# Altium PCB main_v2.PCBDOC
Units mm, origin at the board's own origin, x right, y up, seen from the top; angles counter-clockwise.
Board outline 101.56 x 52.22 mm, 2 copper layers (Top Layer, Bottom Layer); 5 components, 17 nets, 120 pads, 2 vias.
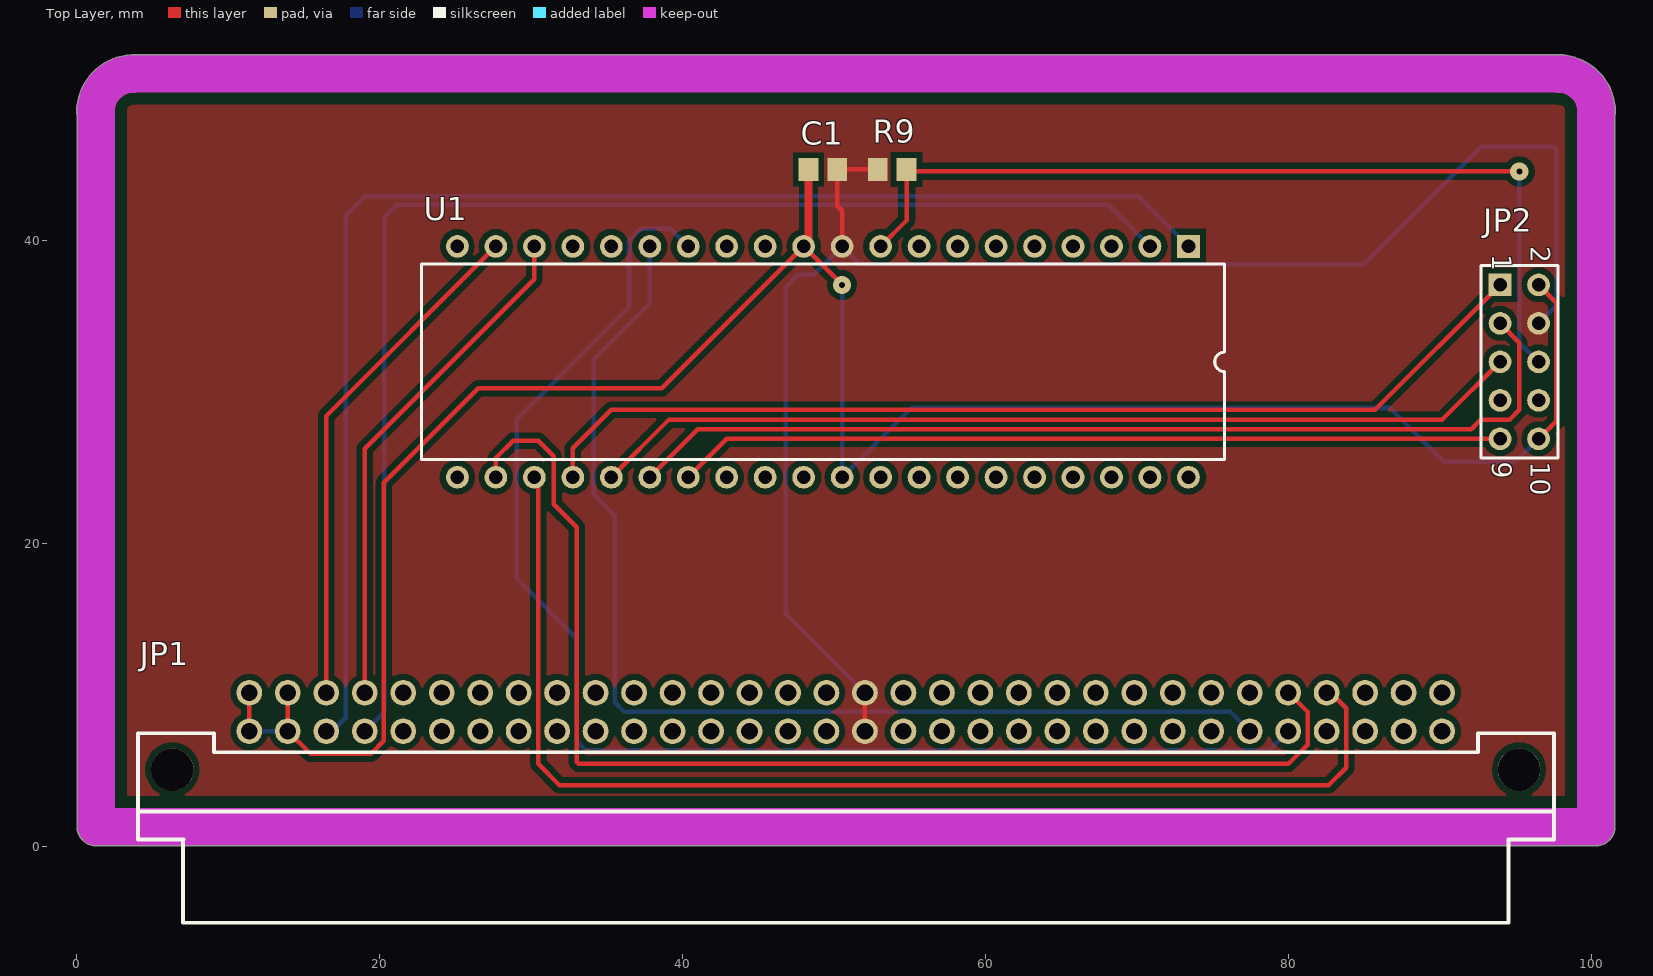
[diagram p0: Top Layer view]
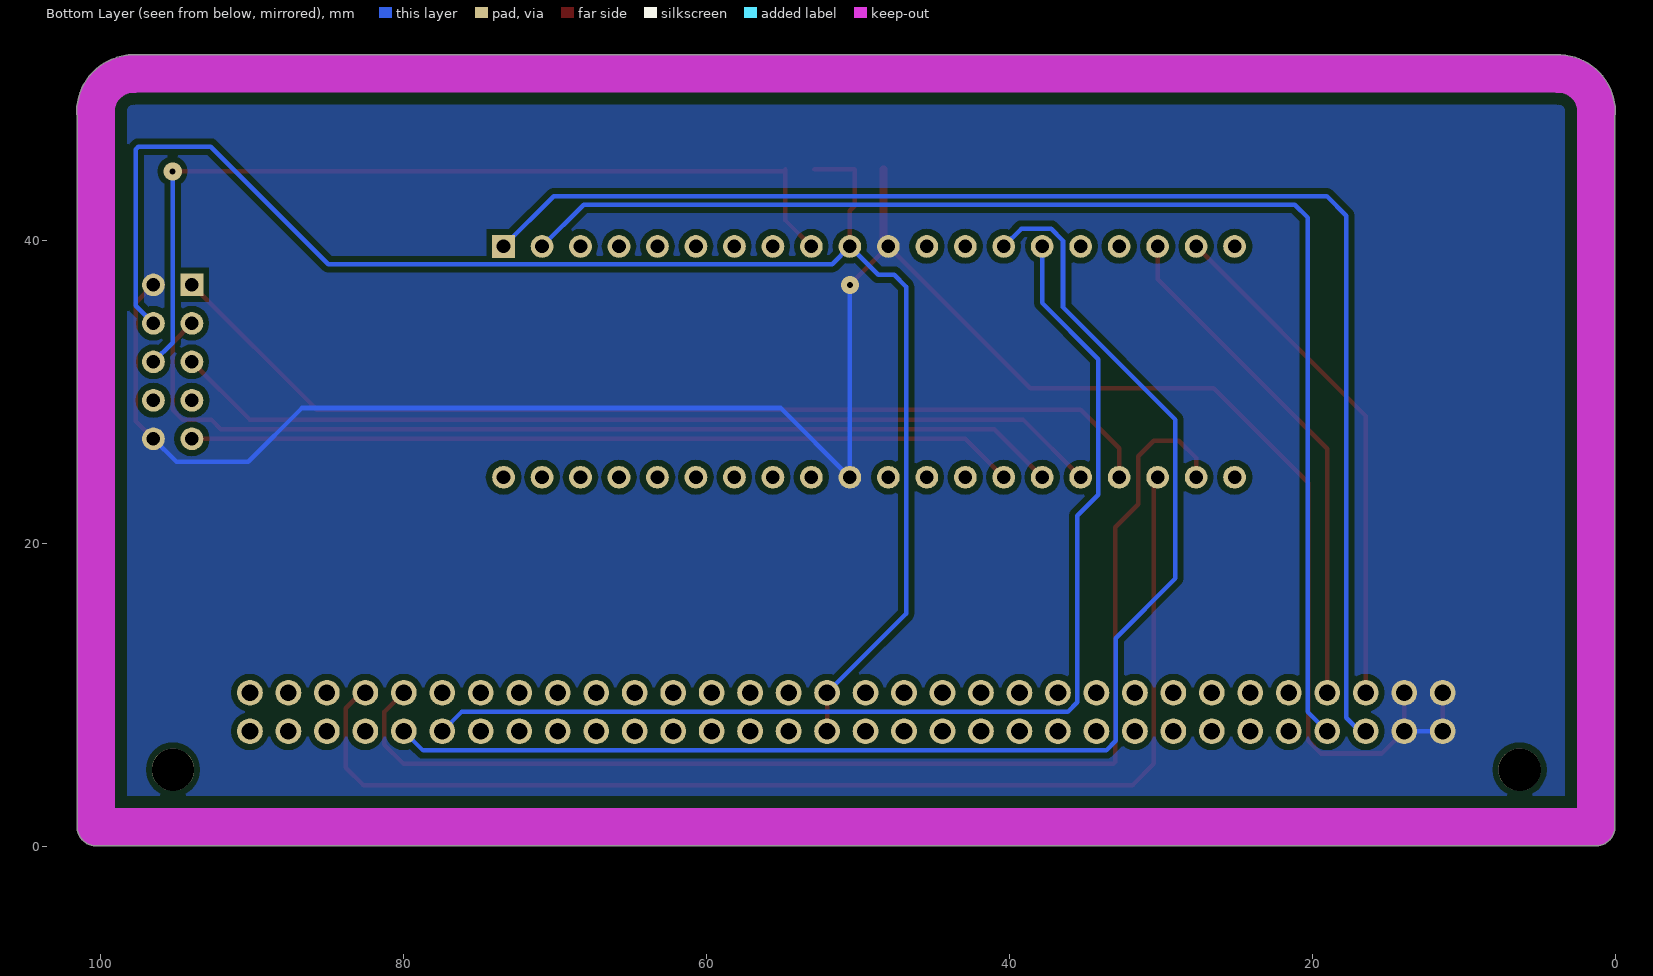
[diagram p1: Bottom Layer view, seen from below]

## Layer stack, top to bottom
Top Layer: signal copper 0.0356
Dielectric: dielectric 0.32, FR-4, Dk 4.8
Bottom Layer: signal copper 0.0356

## Board outline
0.05,1.3 0.05,48.242 cw(c1.27,48.514) 0.02,48.514 cw(c3.77,48.514) 3.62,52.261 cw(c3.8,51.024) 3.8,52.274 98,52.274 cw(c98,51.024) 98.324,52.232 cw(c97.83,48.514) 101.58,48.514 cw(c100.33,48.514) 101.55,48.242 101.55,1.3 cw(c100.3,1.3) 100.292,0.05 1.308,0.05 cw(c1.3,1.3)

## Design rules (kind name [scope] priority, off if disabled: settings)
Clearance Clearance_polly_mill [inpoly vs OnLayer('Keep-Out Layer')] p1: gap=0.8
Clearance Clearance_Poly [All vs inPoly] p2: gap=0.4
Clearance Clearance_1 [All] p3: gap=0.2
ComponentClearance [All] p1: gap=0.254 collisioncheckmode=3 verticalgap=0.254
HoleSize [All] p1: absolutevalues=TRUE maxlimit=5 minlimit=0.4 maxpercent=80.000 minpercent=20.000
PlaneConnect PlaneConnect_PWR [(InNet('+5V') OR InNet('GND'))] p1: planeconnectstyle=Direct reliefexpansion=0.508 reliefentries=4 reliefconductorwidth=0.254 reliefairgap=0.4
PlaneConnect [All] p2: planeconnectstyle=Relief reliefexpansion=0.508 reliefentries=4 reliefconductorwidth=0.3 reliefairgap=0.3
PolygonConnect PolygonConnect_PWR [(InNet('+5V') OR InNet('GND'))] p1: connectstyle=Direct reliefconductorwidth=0.254 reliefentries=4 polygonreliefangle="90 Angle"
PolygonConnect [All] p2: connectstyle=Relief reliefconductorwidth=0.3 reliefentries=4 polygonreliefangle="90 Angle"
RoutingVias [All] p1: holewidth=0.4 width=1.2 viastyle="Through Hole" minholewidth=0.711 minwidth=1.27 maxholewidth=0.711 maxwidth=1.27
SolderMaskExpansion [All] p1: expansion=0.102
TestPointUsage [All] p1: valid=0 allowmultiple=FALSE
Testpoint [All] p1: side=15 testpointundercomponent=TRUE minsize=1.016 maxsize=2.54 preferedsize=1.524 minholesize=0 maxholesize=1.016 preferedholesize=0.813 testpointgrid=0.025 style=1023 order=0123456789
Width [All] p1: maxlimit=2 minlimit=0.3 preferedwidth=0.3 minimp=50.000000 maximp=50.000000 favimp=50.000000
16 further rules are at their usual default settings.

## Components (designator, comment, footprint, x,y, rotation, side; value= is the part's Value field where it differs from the comment)
C1 "Cap Semi_16pF" CR2012-0805 49.276,44.704 r0 top
JP1 "XBotHeader MALE" "DIN 41 612 - MALE TYPE B" 90.15,7.62 r0 top
JP2 "JTAG" HDR2X5 93.98,37.084 r270 top
R9 "Res Semi" CR2012-0805 53.848,44.704 r180 top
U1 "ATmega16-16PI" 40P6 49.276,32.004 r180 top

## Footprints (in the part's own frame and the unit in brackets; to place one, negate y for a bottom-side part, rotate by r counter-clockwise, add the part's x,y. Pads: shape width x height; smd on the part's side, far side on the other; paste and mask are expansions set on the pad)
40P6 [mm] "DIP; 40 Leads; Row Spacing 15.24 mm; Pitch 2.54 mm"
  rect 1.5x1.5 hole 0.9: 1(-24.13,-7.62)
  round 1.5 hole 0.9: 2(-21.59,-7.62) 3(-19.05,-7.62) 4(-16.51,-7.62) 5(-13.97,-7.62) 6(-11.43,-7.62) 7(-8.89,-7.62) 8(-6.35,-7.62) 9(-3.81,-7.62) 10(-1.27,-7.62) 11(1.27,-7.62) 12(3.81,-7.62) 13(6.35,-7.62) 14(8.89,-7.62) 15(11.43,-7.62) 16(13.97,-7.62) 17(16.51,-7.62) 18(19.05,-7.62) 19(21.59,-7.62) 20(24.13,-7.62) 21(24.13,7.62) 22(21.59,7.62) 23(19.05,7.62) 24(16.51,7.62) 25(13.97,7.62) 26(11.43,7.62) 27(8.89,7.62) 28(6.35,7.62) 29(3.81,7.62) 30(1.27,7.62) 31(-1.27,7.62) 32(-3.81,7.62) 33(-6.35,7.62) 34(-8.89,7.62) 35(-11.43,7.62) 36(-13.97,7.62) 37(-16.51,7.62) 38(-19.05,7.62) 39(-21.59,7.62) 40(-24.13,7.62)
  silkscreen extent -26.5,-6.45 26.5,6.45
CR2012-0805 [mm] "Chip Resistor; Body 2.0 x 1.3 mm (LxW typ)"
  rect 1.3x1.5 smd: 1(-0.95,0) 2(0.95,0)
"DIN 41 612 - MALE TYPE B" [mm] "Backplane connector angled pins"
  round 2.8 hole 2.8: 0(-83.82,-2.54) 0(5.08,-2.54)
  round 1.7 hole 1.1: A1(0,0) A2(-2.54,0) A3(-5.08,0) A4(-7.62,0) A5(-10.16,0) A6(-12.7,0) A7(-15.24,0) A8(-17.78,0) A9(-20.32,0) A10(-22.86,0) A11(-25.4,0) A12(-27.94,0) A13(-30.48,0) A14(-33.02,0) A15(-35.56,0) A16(-38.1,0) A17(-40.64,0) A18(-43.18,0) A19(-45.72,0) A20(-48.26,0) A21(-50.8,0) A22(-53.34,0) A23(-55.88,0) A24(-58.42,0) A25(-60.96,0) A26(-63.5,0) A27(-66.04,0) A28(-68.58,0) A29(-71.12,0) A30(-73.66,0) A31(-76.2,0) A32(-78.74,0) B1(0,2.54) B2(-2.54,2.54) B3(-5.08,2.54) B4(-7.62,2.54) B5(-10.16,2.54) B6(-12.7,2.54) B7(-15.24,2.54) B8(-17.78,2.54) B9(-20.32,2.54) B10(-22.86,2.54) B11(-25.4,2.54) B12(-27.94,2.54) B13(-30.48,2.54) B14(-33.02,2.54) B15(-35.56,2.54) B16(-38.1,2.54) B17(-40.64,2.54) B18(-43.18,2.54) B19(-45.72,2.54) B20(-48.26,2.54) B21(-50.8,2.54) B22(-53.34,2.54) B23(-55.88,2.54) B24(-58.42,2.54) B25(-60.96,2.54) B26(-63.5,2.54) B27(-66.04,2.54) B28(-68.58,2.54) B29(-71.12,2.54) B30(-73.66,2.54) B31(-76.2,2.54) B32(-78.74,2.54)
  silkscreen extent -86.08,-12.64 7.38,-0.14
HDR2X5 [mm] "Connector; Header; 5x2 Position"
  rect 1.5x1.5 hole 0.9: 1(0,0)
  round 1.5 hole 0.9: 2(0,2.54) 3(2.54,0) 4(2.54,2.54) 5(5.08,0) 6(5.08,2.54) 7(7.62,0) 8(7.62,2.54) 9(10.16,0) 10(10.16,2.54)
  silkscreen extent -1.27,-1.27 11.43,3.81

## Part data
C1: library part "Cap Semi", "Capacitor (Semiconductor SIM Model)"
JP1: library part XBotHeaderMale, "Header, 32-Pin, Dual row"
JP2: library part "Header 5X2", "Header, 5-Pin, Dual row"
R9: "Semiconductor Resistor"
U1: "8-Bit AVR Microcontroller with 16K Bytes of In-System Programmable Flash Memory"

## Via types
v1: diameter 1.2, hole 0.4, Top Layer to Bottom Layer, 2 vias

## Nets (pads, with @x,y where several pads share a name; then routed paths per layer and width w, separated by ;. In a path a pad name is that pad's centre, name@x,y a point inside that pad or via, vN(x,y) a via of type N, cw(c..) or ccw(c..) an arc to the next point about the centre after c; other vN are vias at no path point)
+5V: C1.2 JP1.A16 JP1.B16 JP2.4 R9.2 U1.10 | length 107.1
  Top Layer w0.3: U1.10 50.546,41.986 50.226,42.306 C1.2 R9.2 ; JP1.A16 JP1.B16
  Bottom Layer w0.3: JP1.B16 46.838,15.372 46.838,36.959 47.625,37.746 48.668,37.746 U1.10 51.714,38.456 84.988,38.456 92.735,46.203 97.511,46.203 97.688,46.025 97.688,35.712 JP2.4
\R\E\S\E\T\: JP2.6 R9.1 U1.9 | length 59.4
  Top Layer w0.3: U1.9 54.798,41.336 R9.1 54.925,44.577 v1(95.25,44.577)
  Bottom Layer w0.3: v1(95.25,44.577) 95.25,33.274 JP2.6
ECHO_PULSE: JP1.A29 U1.2 | length 86.5
  Bottom Layer w0.3: JP1.A29 19.05,7.62 20.32,8.89 20.32,41.529 21.167,42.376 68.114,42.376 U1.2
GND: C1.1 JP1.A31 JP1.A32 JP1.B31 JP1.B32 JP2.2 JP2.10 U1.11 U1.31 | length 148.7
  Top Layer w0.3: JP1.A32 JP1.B32 ; JP1.B31 JP1.A31 15.423,6.147 19.456,6.147 20.295,6.985 20.295,24.028 26.518,30.251 38.633,30.251 U1.11 ; U1.11@48.326,39.944 U1.11 ; v1(50.546,37.084) U1.11 ; JP2.10 97.688,28.092 97.688,35.916 JP2.2
  Top Layer w0.5: U1.11@48.326,39.944 C1.1
  Bottom Layer w0.3: JP1.A32 JP1.A31 ; v1(50.546,37.084) U1.31 55.118,28.956 86.716,28.956 90.272,25.4 94.996,25.4 JP2.10
RXD: JP1.A5 U1.14 | length 90.2
  Bottom Layer w0.3: U1.14 39.218,40.792 37.262,40.792 36.474,40.005 36.474,35.611 29.058,28.194 29.058,17.704 32.995,13.767 32.995,6.985 33.63,6.35 78.72,6.35 JP1.A5
SCL: JP1.B5 U1.22 | length 79.6
  Top Layer w0.3: U1.22 27.686,25.654 28.829,26.797 30.48,26.797 31.496,25.781 31.496,22.606 33.02,21.082 33.02,5.588 33.147,5.461 80.01,5.461 81.28,6.731 81.28,8.89 80.01,10.16 JP1.B5
SDA: JP1.B4 U1.23 | length 79.1
  Top Layer w0.3: U1.23 30.48,24.13 30.48,5.461 31.877,4.064 82.677,4.064 83.82,5.207 83.82,9.144 82.804,10.16 JP1.B4
TCK: JP2.1 U1.24 | length 67.6
  Top Layer w0.3: U1.24 32.766,26.289 35.306,28.829 85.725,28.829 JP2.1
TDI: JP2.9 U1.27 | length 54.6
  Top Layer w0.3: U1.27 42.926,26.924 JP2.9
TDO: JP2.3 U1.26 | length 65.5
  Top Layer w0.3: U1.26 41.021,27.559 92.075,27.559 92.71,28.194 94.615,28.194 95.25,28.829 95.25,33.274 JP2.3
TMS: JP2.5 U1.25 | length 61.8
  Top Layer w0.3: U1.25 39.116,28.194 90.17,28.194 JP2.5
TRIGG_PULSE: JP1.A30 U1.1 | length 92.3
  Bottom Layer w0.3: JP1.A30 16.891,7.62 17.78,8.509 17.78,41.656 19.05,42.926 70.104,42.926 U1.1
TXD: JP1.A6 U1.15 | length 74.9
  Bottom Layer w0.3: U1.15 37.846,35.89 34.138,32.182 34.138,23.241 35.535,21.844 35.535,9.525 36.17,8.89 76.18,8.89 JP1.A6
X_SERVO: JP1.B29 U1.18 | length 34.1
  Top Layer w0.3: JP1.B29 19.03,26.269 30.226,37.465 U1.18
XTAL_1: U1.13
XTAL_2: U1.12
Y_SERVO: JP1.B30 U1.19 | length 34.1
  Top Layer w0.3: JP1.B30 16.49,28.428 U1.19
pads on no net: JP1.0 JP1.A1 JP1.A2 JP1.A3 JP1.A4 JP1.A7 JP1.A8 JP1.A9 JP1.A10 JP1.A11 JP1.A12 JP1.A13 JP1.A14 JP1.A15 JP1.A17 JP1.A18 JP1.A19 JP1.A20 JP1.A21 JP1.A22 JP1.A23 JP1.A24 JP1.A25 JP1.A26 JP1.A27 JP1.A28 JP1.B1 JP1.B2 JP1.B3 JP1.B6 JP1.B7 JP1.B8 JP1.B9 JP1.B10 JP1.B11 JP1.B12 JP1.B13 JP1.B14 JP1.B15 JP1.B17 JP1.B18 JP1.B19 JP1.B20 JP1.B21 JP1.B22 JP1.B23 JP1.B24 JP1.B25 JP1.B26 JP1.B27 JP1.B28 JP2.7 JP2.8 U1.3 U1.4 U1.5 U1.6 U1.7 U1.8 U1.16 U1.17 U1.20 U1.21 U1.28 U1.29 U1.30 U1.32 U1.33 U1.34 U1.35 U1.36 U1.37 U1.38 U1.39 U1.40

## Polygon pours and split planes (outlines as drawn)
+5V on Top Layer "Top Layer-+5V" (solid, pour order 1000): 1.651,50.546 100.711,50.546 100.711,1.778 1.27,1.778 1.27,50.038
GND on Bottom Layer "Bottom Layer-GND" (solid, remove dead copper, pour order 1001): -1.27,49.657 103.759,49.657 103.759,-2.667 -1.397,-2.667 -1.397,50.038

## Keep-outs
Keep-Out Layer:
  lines w2.5: 1.27,48.514 cw(c3.77,48.514) 3.77,51.014 ; 1.3,48.5 1.3,1.3 100.3,1.3 100.3,48.5 ; 3.8,51.024 98,51.024 ; 97.83,51.014 cw(c97.83,48.514) 100.33,48.514

## Silkscreen, mask and mechanical layers (free items; w line width, h text height)
Top Solder:
  text "Ultra controler ver 2.0" at 57.785,17.907 h1.52
  text "Andreas Kingback 2007" at 57.785,15.367 h1.52
Drill Drawing:
  text ".LEGEND" at 106.68,5.08 h1.52
  text "Drill Drawing." at 106.68,2.54 h1.52

## Text inside footprints (layer, text, board x,y; h text height)
JP2: Top Overlay "10" at 96.012,25.4 h1.27 r270; Top Overlay "9" at 93.472,25.4 h1.27 r270; Top Overlay "1" at 93.472,39.116 h1.27 r270; Top Overlay "2" at 96.012,39.624 h1.27 r270